# Altium PCB PCB.PcbDoc
Units mm, origin at the board's own origin, x right, y up, seen from the top; angles counter-clockwise.
Board outline 80 x 50 mm, 2 copper layers (Top Layer, Bottom Layer); 107 components, 80 nets, 393 pads, 363 vias.
Unrouted connection lines stored in the file: 2.
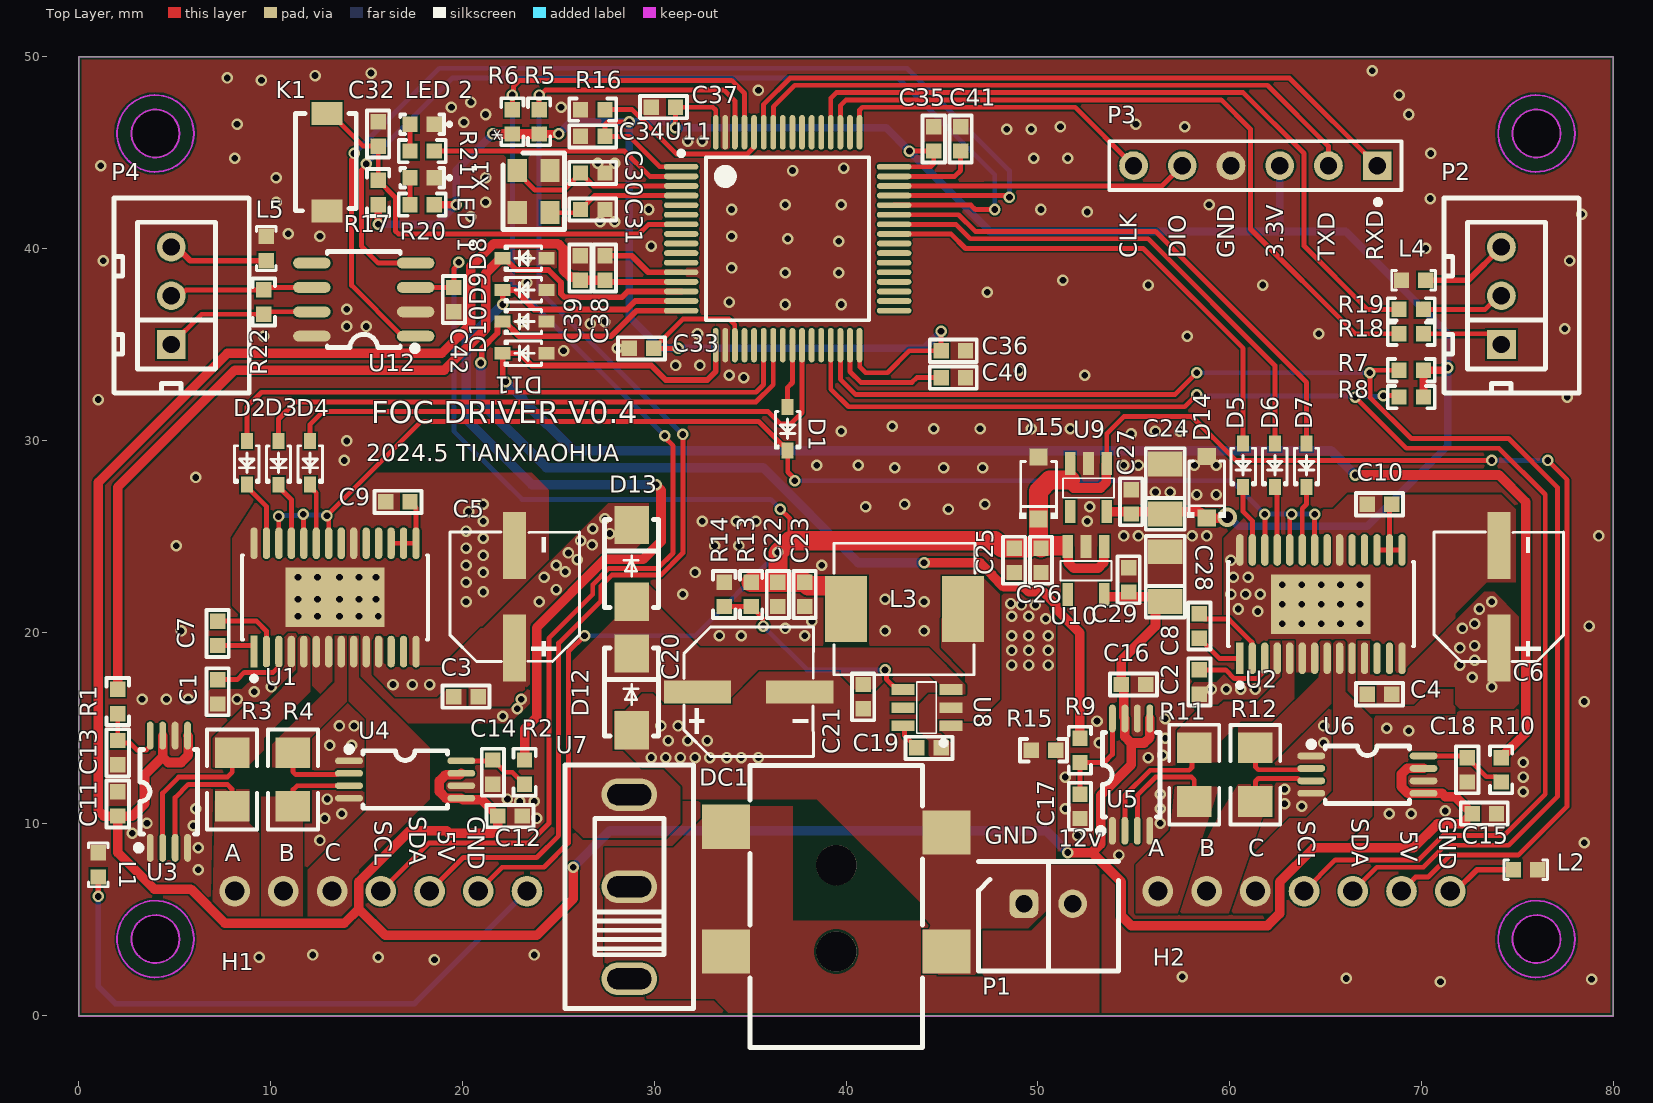
[diagram p0: Top Layer view]
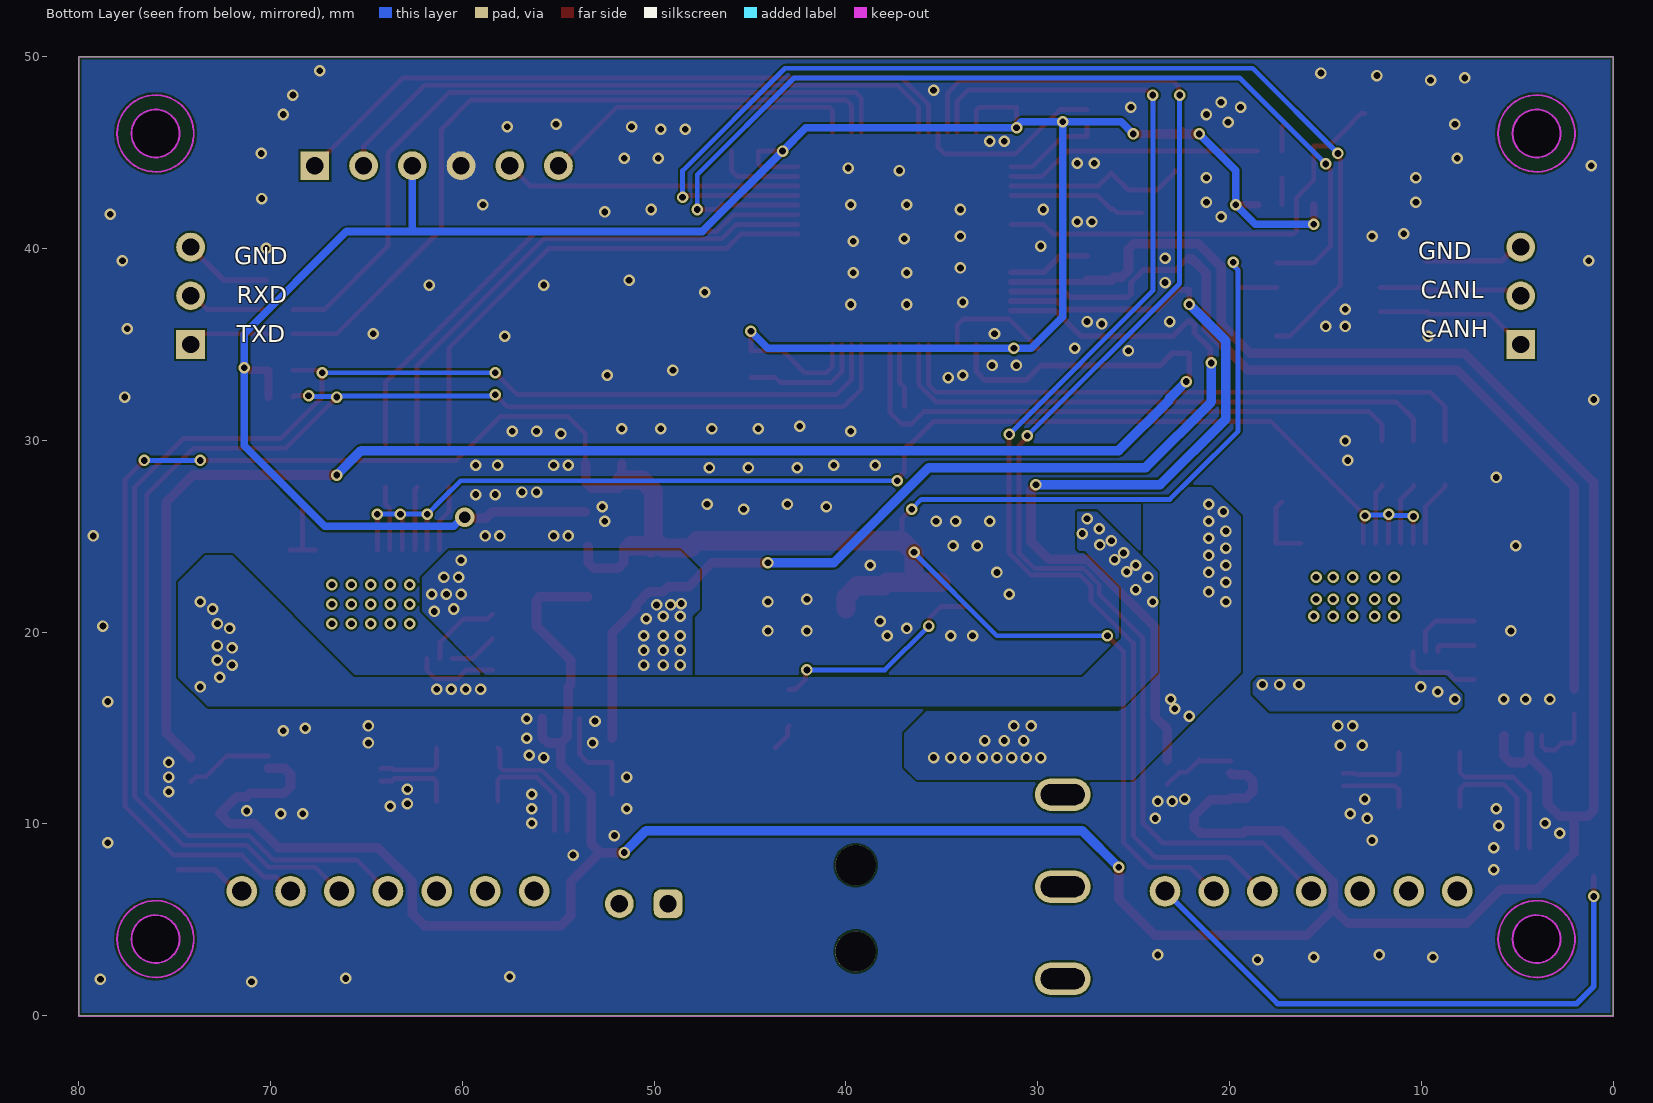
[diagram p1: Bottom Layer view, seen from below]

## Layer stack, top to bottom
Top Solder: solder mask 0.0102, Solder Resist, Dk 3.5
Top Layer: signal copper 0.0356
Dielectric 1: dielectric 0.32, FR-4, Dk 4.8
Bottom Layer: signal copper 0.0356
Bottom Solder: solder mask 0.0102, Solder Resist, Dk 3.5

## Board outline
0,0 0,50 80,50 80,0
cut-out: 74.75,46 ccw(c76,46) 76,44.75 ccw(c76,46) 77.25,46 ccw(c76,46) 76,47.25 ccw(c76,46)
cut-out: 74.75,4 ccw(c76,4) 76,2.75 ccw(c76,4) 77.25,4 ccw(c76,4) 76,5.25 ccw(c76,4)
cut-out: 2.75,4 ccw(c4,4) 4,2.75 ccw(c4,4) 5.25,4 ccw(c4,4) 4,5.25 ccw(c4,4)
cut-out: 4,44.75 cw(c4,46) 2.75,46 cw(c4,46) 4,47.25 cw(c4,46) 5.25,46 cw(c4,46)

## Design rules (kind name [scope] priority, off if disabled: settings)
Clearance [All] p1: gap=0.1 ignorepadtopadclearanceinfootprint=FALSE except(0: Arc-Hole Track-Hole SMDPad-Hole THPad-Hole Via-Hole Fill-Hole Poly-Hole Region-Hole Text-Hole; 0.102: Arc-Arc Arc-Track Arc-SMDPad Arc-THPad Track-Track Track-SMDPad Track-THPad SMDPad-SMDPad SMDPad-THPad THPad-THPad; 0.127: Arc-Via Track-Via SMDPad-Via SMDPad-Text THPad-Via Via-Via; 0.254: Arc-Text Track-Text THPad-Text Via-Text Fill-Text Poly-Text Region-Text Text-Text)
HoleSize [All] p1: absolutevalues=TRUE maxlimit=30 minlimit=0.025 maxpercent=80.000 minpercent=20.000
HoleToHoleClearance [All] p1: gap=0.152 allowstackedmicrovias=TRUE
MinimumSolderMaskSliver [All] p1: minsoldermaskwidth=0
PlaneClearance [All] p1: clearance=0.254
PlaneConnect [All] p1: planeconnectstyle=Direct reliefexpansion=0.508 reliefentries=4 reliefconductorwidth=0.254 reliefairgap=0.254
PolygonConnect [All] p1: connectstyle=Direct reliefconductorwidth=0.254 reliefentries=4 polygonreliefangle="90 Angle" airgapwidth=0.254
RoutingVias [All] p1: holewidth=0.711 width=1.27 viastyle="Through Hole" minholewidth=0.3 minwidth=0.5 maxholewidth=30 maxwidth=30
SilkToSilkClearance [All] p1: silktosilkclearance=0
SilkToSolderMaskClearance [IsPad] p1: minsilkscreentomaskgap=0 clearancetoexposedcopper=TRUE
SolderMaskExpansion [All] p1: expansion=0.102 istentingtop=FALSE
Width [All] p1: maxlimit=3 minlimit=0.1 preferedwidth=0.254
23 further rules are at their usual default settings.

## Classes and differential pairs
component class Sheet3-can: C42 L5 P4 R21 U12
component class Sheet0-MCU: C30 C31 C32 C33 C34 C35 C36 C37 C38 C39 C40 C41 K1 L4 "LED 1" "LED 2" P2 P3 R16 R17 R18 R19 R21 U11 X1
component class Sheet2-power: C19 C20 C21 C22 C23 C24 C25 C26 C27 C28 C29 D12 D13 D14 D15 DC1 L3 P1 R13 R14 R15 U7 U8 U9 U10
component class Sheet1-driver: C1 C2 C3 C4 C5 C6 C7 C8 C9 C10 C11 C12 C13 C14 C15 C16 C17 C18 D1 D2 D3 D4 D5 D6 D7 D8 D9 D10 D11 H1 H2 L2 L3 R1 R2 R3 R4 R5 R6 R7 R8 R9 R10 R11 R12 U1 U2 U3 U4 U5 U6

## Components (designator, comment, footprint, x,y, rotation, side; value= is the part's Value field where it differs from the comment)
C1 "100nF" CC1608-0603 7.239,16.891 r270 top
C2 "100nF" CC1608-0603 58.42,17.399 r270 top
C3 "100NF 50V" CC1608-0603 20.193,16.637 r180 top
C4 "100NF 50V" CC1608-0603 67.818,16.764 r180 top
C5 "35V 100uF" CAP-SMD_D6.3 22.723,21.847 r90 top
C6 "35V 100uF" CAP-SMD_D6.3 74.041,21.844 r90 top
C7 "0.01uF" CC1608-0603 7.239,19.939 r270 top
C8 "0.01uF" CC1608-0603 58.42,20.32 r270 top
C9 "0.47UF" CC1608-0603 16.637,26.797 r180 top
C10 "0.47UF" CC1608-0603 67.818,26.67 r180 top
C11 "100nF" CC1608-0603 2.032,11.049 r90 top
C12 "100nF" CC1608-0603 22.479,10.414 r0 top
C13 "2.2nF" CC1608-0603 2.032,13.716 r90 top
C14 "2.2nF" CC1608-0603 21.59,12.7 r90 top
C15 "100nF" CC1608-0603 73.279,10.541 r0 top
C16 "100nF" CC1608-0603 54.991,17.272 r0 top
C17 "2.2nF" CC1608-0603 52.197,10.922 r90 top
C18 "2.2nF" CC1608-0603 72.39,12.827 r90 top
C19 "100nF" CC1608-0603 44.323,13.97 r0 top
C20 "35V 100uF" CAP-SMD_D6.3 34.922,16.891 r0 top
C21 "100NF 50V" CC1608-0603 40.894,16.637 r90 top
C22 "22uf" CC1608-0603 36.449,21.971 r90 top
C23 "22uf" CC1608-0603 37.846,21.971 r90 top
C24 "22uF" TAN-A-1206 56.642,27.432 r90 top
C25 "2.2uf" CC1608-0603 48.768,23.749 r90 top
C26 "100nF" CC1608-0603 50.165,23.749 r90 top
C27 "100NF" CC1608-0603 54.864,26.797 r90 top
C28 "22uF" TAN-A-1206 56.642,22.86 r90 top
C29 "100NF" CC1608-0603 54.737,22.733 r90 top
C30 "22pF" CC1608-0603 26.797,43.942 r180 top
C31 "22pF" CC1608-0603 26.797,42.037 r180 top
C32 "1UF" CC1608-0603 15.611,45.974 r270 top
C33 "100NF" CC1608-0603 29.337,34.798 r0 top
C34 "100NF" CC1608-0603 26.797,45.847 r0 top
C35 "100NF" CC1608-0603 44.577,45.72 r270 top
C36 "100NF" CC1608-0603 45.593,34.671 r180 top
C37 "100NF" CC1608-0603 30.48,47.371 r0 top
C38 "100NF" CC1608-0603 27.432,38.989 r270 top
C39 "1uF" CC1608-0603 26.152,38.989 r270 top
C40 "2.2UF" CC1608-0603 45.593,33.274 r0 top
C41 "2.2UF" CC1608-0603 45.974,45.72 r270 top
C42 "100nF" CC1608-0603 19.558,37.338 r270 top
D1 "1N4148" SOD-323 36.957,30.61 r90 top
D2 "1N4148" SOD-323 8.763,28.829 r90 top
D3 "1N4148" SOD-323 10.414,28.826 r90 top
D4 "1N4148" SOD-323 12.065,28.829 r90 top
D5 "1N4148" SOD-323 60.706,28.702 r90 top
D6 "1N4148" SOD-323 62.357,28.702 r90 top
D7 "1N4148" SOD-323 64.008,28.702 r90 top
D8 "PESD3V3L1BA" SOD-323 23.241,39.497 r0 top
D9 "PESD3V3L1BA" SOD-323 23.241,37.846 r0 top
D10 "PESD3V3L1BA" SOD-323 23.241,36.195 r0 top
D11 "PESD3V3L1BA" SOD-323 23.241,34.544 r0 top
D12 "SMBJ24A" "DO-214 AA" 28.819,16.891 r270 top
D13 "SS34" "DO-214 AA" 28.819,23.59 r270 top
D14 "SMFJ5.0A" SOD-123 58.801,27.559 r90 top
D15 "SMFJ5.0A" SOD-123 50.038,27.518 r90 top
DC1 "DC-2.1" DC-IN-SMD_DC-050-25A 39.497,6.604 r180 top
H1 "Header_7P_Curved" Header_2_54_7PW 8.128,6.5 r0 top locked
H2 "Header_7P_Curved" Header_2_54_7PW 56.261,6.5 r0 top locked
K1 "KEY 3*4" "KEY 3*4" 12.944,47.05 r270 top
L1 "68nH 200mA" Inductor-0603 1.016,7.874 r90 top
L2 "68nH 200mA" Inductor-0603 75.438,7.62 r0 top
L3 "15uH" Inductor-0630 43.053,21.209 r0 top
L4 "68nH 200mA" Inductor-0603 69.596,38.354 r180 top
L5 "68nH 200mA" Inductor-0603 9.779,40.005 r90 top
"LED 1" "LED 0603" "LED 0603" 17.907,43.688 r0 top
"LED 2" "LED 0603" "LED 0603" 17.907,46.482 r0 top
P1 "Header 2" HX2.54-2 49.276,5.842 r0 top
P2 "Header 3" HX2.54-3 74.168,35 r90 top locked
P3 "Header 6" HDR1X6 67.691,44.323 r180 top
P4 "Header 3" HX2.54-3 4.826,35 r90 top locked
R1 "22R" CR1608-0603 2.032,16.383 r270 top
R2 "22R" CR1608-0603 23.241,12.7 r270 top
R3 "0.01R" CR3216-1206 7.991,12.319 r90 top
R4 "0.01R" CR3216-1206 11.166,12.322 r90 top
R5 "4.7k/NC" CR1608-0603 24.003,46.609 r270 top
R6 "4.7k/NC" CR1608-0603 22.606,46.609 r270 top
R7 "4.7k/NC" CR1608-0603 69.469,33.655 r0 top
R8 "4.7k/NC" CR1608-0603 69.469,32.258 r0 top
R9 "22R" CR1608-0603 52.197,13.843 r270 top
R10 "22R" CR1608-0603 74.158,12.827 r270 top
R11 "0.01R" CR3216-1206 58.156,12.573 r90 top
R12 "0.01R" CR3216-1206 61.341,12.57 r90 top
R13 "100K 1%" CR1608-0603 35.052,21.971 r90 top
R14 "13.3K 1%" CR1608-0603 33.655,21.971 r270 top
R15 "0R" CR1608-0603 50.292,13.843 r180 top
R16 "10KR" CR1608-0603 26.797,47.244 r0 top
R17 "10K" CR1608-0603 15.611,42.926 r270 top
R18 "22R" CR1608-0603 69.469,35.56 r0 top
R19 "22R" CR1608-0603 69.469,36.83 r0 top
R20 "2K" CR1608-0603 17.907,42.291 r0 top
R21 "2K" CR1608-0603 17.907,45.085 r0 top
R22 "120R" CR1608-0603 9.652,37.211 r270 top
U1 "DRV8313PWPR" HTSSOP-28 13.359,21.813 r90 top
U2 "DRV8313PWPR" HTSSOP-28 64.76,21.463 r90 top
U3 "INA240A1PWR" TSSOP-8 4.699,11.684 r0 top
U4 "INA240A1PWR" TSSOP-8 17.018,12.319 r270 top
U5 "INA240A1PWR" TSSOP-8 54.864,12.573 r0 top
U6 "INA240A1PWR" TSSOP-8 67.183,12.573 r270 top
U7 "HX SS12D10G4" SS12D10-G4 28.702,6.731 r90 top
U8 "TPS54202DDCR" SOT23-6 44.196,16.002 r90 top
U9 "SPX3819M5-L-3.3/TR" SOT23-5 51.689,28.789 r0 top
U10 "SPX3819M5-L-3.3/TR" SOT23-5 51.557,24.471 r0 top
U11 "STM32F405RCT6" LQFNP64 36.957,40.513 r0 top locked
U12 "TJA1050T" SOIC-8 14.859,37.338 r90 top locked
X1 "3225_12M" XTAL-3225 24.56,44.069 r270 top

## Footprints (in the part's own frame and the unit in brackets; to place one, negate y for a bottom-side part, rotate by r counter-clockwise, add the part's x,y. Pads: shape width x height; smd on the part's side, far side on the other; paste and mask are expansions set on the pad)
CAP-SMD_D6.3 [mm] "直径6.3mm固态电容"
  rect 3.5x1.2 smd paste+0 mask+0.051: 1(-2.67,0) 2(2.67,0)
  silkscreen extent -3.38,-3.38 3.38,3.38, body extent -3.65,-3.3 3.65,3.3, height 5.9
CC1608-0603 [mm]
  rect 0.8x0.8 smd: 1(-0.635,0) 2(0.635,0)
  silkscreen extent -1.23,-0.58 1.23,0.58, body extent -0.8,-0.4 0.8,0.4, height 0.3
CR1608-0603 [mm]
  rect 0.8x0.8 smd: 1(-0.635,0) 2(0.635,0)
  silkscreen extent -1.23,-0.58 1.23,0.58, body extent -0.8,-0.4 0.8,0.4, height 0.45
CR3216-1206 [mm]
  rect 1.6x1.8 smd: 1(-1.4,0) 2(1.4,0)
  silkscreen extent -2.6,-1.3 2.6,1.3, body extent -1.6,-0.8 1.6,0.8, height 0.6
DC-IN-SMD_DC-050-25A [mm]
  rect 2.5x2.3 smd: 1(5.75,3.25) 1(5.75,-3.25) 2(-5.75,3.25) 3(-5.75,-2.95)
  round 2.1 hole 2.1 unplated: ""(0,3.25) ""(0,-1.25)
  silkscreen extent -4.5,-6.45 4.5,8.25, body extent -6.28,-6.57 6.28,8.13, height 10.94
"DO-214 AA" [mm] "SMB"
  rect 2x1.8 smd: 1(-2,0) 2(2,0)
  silkscreen extent -2.3,-1.4 2.3,1.4, body extent -2.83,-1.8 2.57,1.8, height 2.4
HDR1X6 [mm] "Connector; Header; 6 Position"
  rect 1.5x1.5 hole 0.9: 1(0,0)
  round 1.5 hole 0.9: 2(2.54,0) 3(5.08,0) 4(7.62,0) 5(10.16,0) 6(12.7,0)
  silkscreen extent -1.27,-1.27 13.97,2.04, body extent -1.27,-1.27 13.97,1.27, height 8.54
Header_2_54_7PW [mm] "6P弯针"
  round 1.6 hole 1: 1(0,0) 2(2.54,0) 3(5.08,0) 4(7.62,0) 5(10.16,0) 6(12.7,0) 7(15.24,0)
  body extent -1.27,-10.07 16.51,0.25, height 2.75
HTSSOP-28 [mm]
  rect 1.655x0.381 smd paste+0 mask+0: 1(-2.825,4.225)
  rrect100% 1.655x0.381 smd paste+0 mask+0: 2(-2.825,3.575) 3(-2.825,2.925) 4(-2.825,2.275) 5(-2.825,1.625) 6(-2.825,0.975) 7(-2.825,0.325) 8(-2.825,-0.325) 9(-2.825,-0.975) 10(-2.825,-1.625) 11(-2.825,-2.275) 12(-2.825,-2.925) 13(-2.825,-3.575) 14(-2.825,-4.225) 15(2.825,-4.225) 16(2.825,-3.575) 17(2.825,-2.925) 18(2.825,-2.275) 19(2.825,-1.625) 20(2.825,-0.975) 21(2.825,-0.325) 22(2.825,0.325) 23(2.825,0.975) 24(2.825,1.625) 25(2.825,2.275) 26(2.825,2.925) 27(2.825,3.575) 28(2.825,4.225)
  rect 3.1x5.18 smd paste-1000 mask+0: 29(0,0)
  silkscreen extent -4.35,-4.85 2.2,4.85, body extent -3.9,-5.1 3.9,5.1, height 0.25
HX2.54-2 [mm] "两针白色插座（已加焊）"
  rrect50% 1.5x1.5 hole 0.9: 1(0,0)
  round 1.5 hole 0.9: 2(2.54,0)
  silkscreen extent -2.36,-3.5 4.94,2.2, body extent -2.48,-3.55 5.02,2.45, height 7
HX2.54-3 [mm]
  rect 1.5x1.5 hole 0.9: 1(0,0)
  round 1.5 hole 0.9: 2(2.54,0) 3(5.08,0)
  silkscreen extent -2.54,-4.06 7.63,3, body extent -2.41,-3.58 7.59,2.42, height 7
Inductor-0603 [mm]
  rect 0.8x0.8 smd: 1(-0.635,0) 2(0.635,0)
  silkscreen extent -1.14,-0.51 1.14,0.51, body extent -0.8,-0.43 0.8,0.43, height 0.48
Inductor-0630 [mm]
  rect 2.194x3.42 smd paste+0 mask+0.051: 1(3.048,0) 2(-3.048,0)
  silkscreen extent -3.68,-3.43 3.68,3.43, body extent -3.5,-3.3 3.5,3.3, height 2.8
"KEY 3*4" [mm]
  rect 1.2x1.6 smd: 1(0,0) 2(5.1,0)
  silkscreen extent 0,-1.65 5.08,1.52, body extent 0.25,-1.71 4.7,1.46, height 2.01
"LED 0603" [mm]
  rect 0.8x0.8 smd: 1(-0.635,0) 2(0.635,0)
  silkscreen extent -1.14,-0.51 1.48,0.51, body extent -0.8,-0.4 0.8,0.4, height 0.6
LQFNP64 [mm]
  oval 1.8x0.3 smd: 1(-5.55,3.75) 2(-5.55,3.25) 3(-5.55,2.75) 4(-5.55,2.25) 5(-5.55,1.75) 6(-5.55,1.25) 7(-5.55,0.75) 8(-5.55,0.25) 9(-5.55,-0.25) 10(-5.55,-0.75) 11(-5.55,-1.25) 12(-5.55,-1.75) 13(-5.55,-2.25) 14(-5.55,-2.75) 15(-5.55,-3.25) 16(-5.55,-3.75) 33(5.55,-3.75) 34(5.55,-3.25) 35(5.55,-2.75) 36(5.55,-2.25) 37(5.55,-1.75) 38(5.55,-1.25) 39(5.55,-0.75) 40(5.55,-0.25) 41(5.55,0.25) 42(5.55,0.75) 43(5.55,1.25) 44(5.55,1.75) 45(5.55,2.25) 46(5.55,2.75) 47(5.55,3.25) 48(5.55,3.75)
  oval 0.3x1.8 smd: 17(-3.75,-5.55) 18(-3.25,-5.55) 19(-2.75,-5.55) 20(-2.25,-5.55) 21(-1.75,-5.55) 22(-1.25,-5.55) 23(-0.75,-5.55) 24(-0.25,-5.55) 25(0.25,-5.55) 26(0.75,-5.55) 27(1.25,-5.55) 28(1.75,-5.55) 29(2.25,-5.55) 30(2.75,-5.55) 31(3.25,-5.55) 32(3.75,-5.55) 49(3.75,5.55) 50(3.25,5.55) 51(2.75,5.55) 52(2.25,5.55) 53(1.75,5.55) 54(1.25,5.55) 55(0.75,5.55) 56(0.25,5.55) 57(-0.25,5.55) 58(-0.75,5.55) 59(-1.25,5.55) 60(-1.75,5.55) 61(-2.25,5.55) 62(-2.75,5.55) 63(-3.25,5.55) 64(-3.75,5.55)
  silkscreen extent -5.67,-4.25 4.25,4.57, body extent -6.07,-6.07 6.07,6.07, height 1.62
SOD-123 [mm]
  rect 0.88x0.96 smd: 1(-1.61,0) 2(1.61,0)
  silkscreen extent -1.6,-1 1.38,1, body extent -1.9,-0.8 1.8,0.8, height 1.32
SOD-323 [mm]
  rect 0.83x0.63 smd paste+0 mask+0.05: 1(-1.14,0) 2(1.14,0)
  silkscreen extent -1.02,-0.64 0.89,0.64, body extent -1.27,-0.68 1.33,0.68, height 1.1
SOIC-8 [mil]
  oval 22.38x76.78 smd paste+0 mask+2: 1(-75,-106.5) 2(-25,-106.5) 3(25,-106.5) 4(75,-106.5) 5(75,106.5) 6(25,106.5) 7(-25,106.5) 8(-75,106.5)
  silkscreen extent -106,-111 98,75, body extent -98,-125 98,120, height 69
SOT23-5 [mm] "适用于MIC5205"
  rect 0.55x1.2 smd: 1(1.905,0) 2(0.955,0) 3(0.005,0) 4(0.005,-2.5) 5(1.905,-2.5)
  silkscreen extent -0.38,-1.78 2.29,-0.76, body extent -0.6,-2.82 2.5,0.38, height 1.45
SOT23-6 [mm]
  rect 0.55x1.2 smd: 1(-0.889,-1.27) 2(0.061,-1.27) 3(1.011,-1.27) 4(1.011,1.23) 5(0.061,1.23) 6(-0.889,1.23)
  silkscreen extent -1.9,-1.02 1.4,0.51, body extent -1.39,-1.4 1.51,1.4, height 1.45
SS12D10-G4 [mm]
  oval 1.7x2.9 hole 1.1 slot 2.3 at 90 deg: 1(-4.8,0) 2(0,0) 3(4.8,0)
  silkscreen extent -6.35,-3.35 6.35,3.35, body extent -6.32,-3.25 6.3,3.25, height 9.3
TAN-A-1206 [mm]
  rect 1.3x1.8 smd: 1(-1.27,0) 2(1.333,0)
  silkscreen extent -2.1,-1.02 2.16,1.02, body extent -1.66,-0.8 1.54,0.8, height 1.6
TSSOP-8 [mm]
  oval 0.353x1.454 smd: 1(-0.975,-2.927) 2(-0.325,-2.927) 3(0.325,-2.927) 4(0.975,-2.927) 5(0.975,2.927) 6(0.325,2.927) 7(-0.325,2.927) 8(-0.975,2.927)
  silkscreen extent -1.73,-3.08 1.5,2.2, body extent -1.43,-3.17 1.57,3.11, height 1.09
XTAL-3225 [mm]
  rect 1.2x1 smd: 1(0,-1.7) 2(2.2,-1.7) 3(2.2,0) 4(0,0)
  silkscreen extent -0.91,-2.44 3.07,0.76, body extent -0.43,-2.15 2.77,0.35, height 0.61

## Part data
C1 C2 C3 C4 C7 C8 C9 C10 C11 C12 C13 C14 C15 C16 C17 C18 C19 C21 C22 C23 C25 C26 C30 C31 C32 C33 C34 C35 C36 C37 C38 C39 C40 C41 C42: library part "Cap Chip 0603", "0603封装的电容", Published=8-Jun-2000, Publisher="Altium Limited", Revision="July-2002: Re-released for DXP Platform."
C5 C6 C20: library part "Cap ECAP SMD", "铝点解电容", BOM_Manufacturer=PANASONIC, BOM_Manufacturer Part=EEEFP1C681AP, BOM_Supplier=LCSC, BOM_Supplier Part=C413527, Contributor=LCSC, nameAlias=Capacitance, spicePre=C, spiceSymbolName=EEEFP1C681AP
C24 C28: library part "CAP TAN-A-1206", "钽电容"
C27 C29: library part "Chip capacitor", "贴片电容"
D1 D2 D3 D4 D5 D6 D7: "1N5819 SOD-323封装 小体积SS14 印S4 肖特基二极管"
D8 D9 D10 D11: "SOD-323 3.3V 双向ESD防静电二极管保护芯片", JLCPCB Part Class="Extended Part", Manufacturer=MDD, Manufacturer Part=SMAJ6.5CA, spicePre=D, spiceSymbolName=SMAJ6.5CA-C110041, Supplier=LCSC, Supplier Part=C110041
D12: library part SMBJ18A, "TVS稳压二极管"
D13: "肖特基二极管"
D14 D15: "5V单向贴片TVS瞬变抑制二极管"
DC1: library part DC-050, "DC贴片插座", BOM_JLCPCB Part Class="Extended Part", BOM_Manufacturer=韩国韩荣, BOM_Manufacturer Part=DC-050-25A, BOM_Supplier=LCSC, BOM_Supplier Part=C707275, Contributor=LCSC, spicePre=D, spiceSymbolName=DC-050-25A
H1 H2: "弯的6P排针"
K1: "轻触开关按键"
L1 L2 L4 L5: library part Inductor-0603, "贴片电感 0603封装"
L3: library part Inductor-0630, "贴片电感 0630封装"
P1: "Header, 2-Pin", LatestRevisionDate=17-Jul-2002, LatestRevisionNote="Re-released for DXP Platform.", Publisher="Altium Limited"
P2 P4: "Header, 3-Pin", LatestRevisionDate=17-Jul-2002, LatestRevisionNote="Re-released for DXP Platform.", Publisher="Altium Limited"
P3: "Header, 6-Pin", LatestRevisionDate=17-Jul-2002, LatestRevisionNote="Re-released for DXP Platform.", Publisher="Altium Limited"
R1 R2 R5 R6 R7 R8 R9 R10 R13 R14 R15 R16 R17 R18 R19 R20 R21 R22: library part "Resistor Chip 0603", "0603封装电阻", Published=8-Jun-2000, Publisher="Altium Limited", Revision="July-2002: Re-released for DXP Platform."
R3 R4 R11 R12: library part "Resistor Chip 1206", "1206封装电阻", Published=8-Jun-2000, Publisher="Altium Limited", Revision="July-2002: Re-released for DXP Platform."
U1 U2: library part DRV8313, "独立控制的半 H 桥驱动器,主要用于驱动一个三项无刷电机IC MOTOR DRIVER 8V-60V 28HTSSOP", Case/Package=HTSSOP, Max Operating Temperature=125°C, Max Supply Voltage=60V, Min Operating Temperature=-40°C, Min Supply Voltage=8V, Output Current=1.75A, Package Quantity=2000, Interface=Parallel, Lead Free="Lead Free", Logic Function="AND GATE", Mount="Surface Mount", Number of Outputs=1, Number of Pins=28, Packaging="Tape and Reel", Series=-
U3 U4 U5 U6: "超精密电流检测放大器"
U7: library part SS12D10G4, BOM_JLCPCB Part Class="Extended Part", BOM_Manufacturer=hanxia(韩下), BOM_Manufacturer Part="HX SS12D10G4", BOM_Supplier=LCSC, BOM_Supplier Part=C5149841, Contributor=lcsc, link=https://atta.szlcsc.com/upload/public/pdf/source/20220907/2020D7183ED16DD6E2B9F5A13FB144CF.pdf, spicePre=U, spiceSymbolName="HX SS12D10G4"
U8: "同步降压转换器芯片 500Khz 4.2~28V输入，2A输出"
U9 U10: "LDO 3.3V , SOT-23-5 500ma"
U12: "1Mhz Can芯片，兼容3.3~5V设备", BOM_JLCPCB Part Class="Basic Part", BOM_Manufacturer=NXP(恩智浦), BOM_Manufacturer Part=TJA1050T/CM,118, BOM_Supplier=LCSC, BOM_Supplier Part=C6952, spicePre=U, spiceSymbolName=TJA1050T/CM,118
X1: library part "XTAL 3225", "3225封装的晶振"
U11: Contributor=czycb, spicePre=U, spiceSymbolName=STM32F405RCT6

## Via types
v1: diameter 0.6, hole 0.35, Top Layer to Bottom Layer, tented both sides, 362 vias
v2: diameter 1, hole 0.6, Top Layer to Bottom Layer, 1 vias

## Nets (pads, with @x,y where several pads share a name; then routed paths per layer and width w, separated by ;. In a path a pad name is that pad's centre, name@x,y a point inside that pad or via, vN(x,y) a via of type N, cw(c..) or ccw(c..) an arc to the next point about the centre after c; other vN are vias at no path point)
3.3V: C24.1 C27.1 C33.2 C34.2 C35.2 C36.2 C37.2 D14.1 P3.3 R5.2 R6.2 R7.2 R8.2 R17.2 R20.2 U9.5 U11.1 U11.19 U11.32 U11.48 U11.64 | length 154.5
  Top Layer w0.254: v1(28.702,46.609) 27.581,46.609 27.432,46.46 C34.2 28.702,45.847 30.286,44.263 U11.1 ; v1(31.106,46.292) 31.106,47.362 C37.2 33.058,47.371 33.207,47.222 U11.64 ; v1(31.242,34.798) C33.2 31.496,36.322 33.909,36.322 34.198,36.033 34.198,34.972 U11.19 ; U11.32 40.716,34.954 40.716,33.833 41.021,33.528 42.164,33.528 43.307,34.671 C36.2 v1(44.958,35.687) ; U11.48 44.428,44.263 44.577,44.412 C35.2 v1(43.307,45.085)
  Top Layer w0.4: R17.2 15.611,41.412 v1@15.621,41.402 ; R20.2 v1(19.685,42.291) ; R5.2 v1(25.019,45.974) ; R8.2 R7.2 71.193,33.655 71.32,33.782 v1(71.374,33.782)
  Top Layer w0.5: v1(21.59,45.974) 22.456,45.974 22.479,45.997 22.479,46.101 R6.2 R5.2 ; U9.5 58.421,26.289 58.761,25.949 D14.1 59.831,25.949 59.917,26.035 v2@59.944,26.035
  Bottom Layer w0.4: v1(15.621,41.275) 18.669,41.275 v1(19.685,42.291) 19.685,44.069 v1(21.59,45.974) ; v1(25.019,45.974) 25.654,46.609 v1(28.702,46.609) ; v1(31.106,46.292) 42.1,46.292 v1(43.307,45.085) 47.498,40.894 62.611,40.894 ; v1@31.115,46.355 30.861,46.609 v1(28.702,46.609) ; v1(44.958,35.687) 44.069,34.798 v1(31.242,34.798) 31.231,34.809 30.342,34.809 28.702,36.449 v1(28.702,46.609) ; v2@59.944,26.035 60.452,25.527 67.183,25.527 71.374,29.718 v1(71.374,33.782) 71.374,35.56 66.04,40.894 62.611,40.894 ; P3.3 62.611,40.894
  other v2: 59.874,25.992
5V: C22.2 C23.2 C25.2 C26.2 C42.1 D15.1 H1.6 H2.6 L3.2 R13.2 U9.1 U9.3 U10.1 U10.3 U12.3 | length 151.6
  Top Layer w0.254: U12.3 C42.1 19.558,38.947 19.806,39.195 v1(19.806,39.288) ; H1.6 22.075,7.747 24.257,7.747 25.527,9.017 25.527,18.97 v1(26.369,19.812) ; v1(36.576,26.416) 37.084,25.908 37.084,24.765 ; U9.1 53.594,30.353 54.483,31.242 58.039,31.242 60.325,28.956 v1(73.66,28.956) ; H2.6 69.7,7.239 70.358,7.239 71.495,8.376 75.051,8.376 77.597,10.922 77.597,27.94 v1(76.581,28.956)
  Top Layer w0.5: U10.3 51.587,24.446 51.587,23.618 51.877,23.328 53.144,23.328 53.437,23.621 53.437,24.446 U10.1 ; U9.3 51.694,27.685 51.86,27.519 53.276,27.519 53.569,27.812 53.569,28.764 U9.1
  Top Layer w1: R13.2 C22.2 ; L3.2 40.005,21.822 39.408,22.419 38.033,22.419 C23.2 C22.2 ; 49.657,24.511 49.53,24.384 C25.2 48.133,24.384 47.752,24.765 37.084,24.765 36.449,24.13 C22.2 ; C26.2 C26.2@50.038,24.511 ; 51.193,24.511 C26.2@50.038,24.511 ; 51.694,27.94 50.624,27.94 50.038,27.354 D15.1 C26.2@50.038,24.511
  Bottom Layer w0.254: v1(19.806,39.288) 19.74,39.222 19.74,39.044 19.558,38.862 19.558,30.48 21.971,28.067 23.114,26.924 36.068,26.924 v1(36.576,26.416) ; v1(26.369,19.812) 32.131,19.812 v1@36.449,24.13 ; v1(73.66,28.956) v1(76.581,28.956)
  other v1: 36.453,24.173
ADC1_IN0: D8.1 R1.1 U11.14 | length 47.9
  Top Layer w0.3: D8.1 22.201,39.497 22.816,38.882 24.491,38.882 25.146,38.227 25.146,37.641 25.322,37.465 28.324,37.465 28.622,37.763 U11.14
  Top Layer w0.5: R1.1 2.032,27.559 8.128,33.655 19.05,33.655 21.209,35.814 21.209,38.705 21.936,39.432 22.036,39.432 D8.1
ADC1_IN1: D9.1 R2.1 U11.15 | length 47.3
  Top Layer w0.3: v1(22.101,37.087) D9.1 22.733,37.846 23.749,36.83 28.575,36.83 29.008,37.263 U11.15
  Top Layer w0.5: R2.1 23.241,14.953 23.876,15.588 23.876,20.24 27.442,23.806 29.432,23.806 30.353,24.727 30.353,27.405 30.099,27.659 v1(30.099,27.686)
  Bottom Layer w0.5: v1(22.101,37.087) 20.193,35.179 20.193,31.115 23.622,27.686 v1(30.099,27.686)
ADC2_IN2: D10.1 R9.1 U11.16 | length 56.8
  Top Layer w0.3: v1(20.955,34.036) 21.012,34.093 21.012,34.775 21.836,35.598 21.836,36.03 22.001,36.195 22.201,36.195 22.963,35.433 27.746,35.433 29.076,36.763 U11.16
  Top Layer w0.5: v1@44.042,23.622 46.992,23.622 47.625,22.989 47.625,22.96 48.222,22.362 49.271,22.362 49.535,22.098 50.292,22.098 50.935,21.455 50.935,21.225 52.197,19.964 R9.1
  Bottom Layer w0.5: v1(20.955,34.036) 20.955,32.004 24.384,28.575 35.687,28.575 40.64,23.622 v1(44.069,23.622)
ADC2_IN3: D11.1 R10.1 U11.17 | length 84.5
  Top Layer w0.3: v1(22.262,33.066) 22.262,33.069 22.101,33.23 D11.1 22.987,34.544 23.622,33.909 29.845,33.909 30.607,33.147 32.766,33.147 33.207,33.588 U11.17
  Top Layer w0.5: v1(66.548,28.194) 74.041,28.194 75.438,26.797 75.438,14.742 R10.1
  Bottom Layer w0.5: v1(22.262,33.066) 23.142,32.186 23.142,32.108 25.786,29.464 65.278,29.464 v1(66.548,28.194)
AGND: "LED 1.2" "LED 2.2" C11.2 C12.2 C13.1 C14.1 C15.2 C16.2 C17.1 C18.1 C22.1 C23.1 C24.2 C25.1 C26.1 C27.2 C28.2 C29.2 C30.1 C31.1 C32.1 C33.1 C34.1 C35.1 C36.1 C37.1 C38.1 C39.1 C40.2 C41.1 C42.2 D8.2 D9.2 D10.2 D11.2 D14.2 D15.2 K1.2 L1.2 L2.2 L4.2 L5.2 P3.4 R14.1 R15.1 R16.1 U3.1 U3.4 U3.6 U4.1 U4.4 U4.6 U5.1 U5.4 U5.6 U6.1 U6.4 U6.6 U9.2 U10.2 U11.12 U11.18 U11.63 U12.2 U12.8 X1.2 X1.4 | length 4.3
  Top Layer w0.3: C38.1 28.829,39.624 29.69,38.763 U11.12
  other v1: 70.993,1.778 78.867,1.905 66.083,1.948 57.531,2.032 18.542,2.921 9.398,3.048 15.621,3.048 12.192,3.175 23.749,3.175 6.223,7.62 54.229,8.382 6.223,8.763 78.486,9.017 12.573,9.144 52.07,9.398 2.794,9.525 5.969,9.906 3.556,10.033 56.388,10.033 12.827,10.287 23.876,10.287 13.716,10.541 68.326,10.541 69.469,10.541 71.247,10.681 6.096,10.795 51.435,10.795 56.388,10.795 63.754,10.922 62.865,11.049 22.987,11.176 23.749,11.176 12.954,11.303 22.352,11.303 56.388,11.557 75.311,11.684 62.865,11.811 51.435,12.446 75.311,12.446 75.311,13.208 55.753,13.462 56.515,13.589 13.081,14.097 14.224,14.097 53.213,14.224 64.897,14.224 56.642,14.478 69.342,14.859 68.199,14.986 13.589,15.113 14.351,15.113 64.897,15.113 53.086,15.367 56.642,15.494 78.486,16.383 3.302,16.51 4.572,16.51 5.715,16.51 33.401,19.812 34.544,19.812 37.846,19.812 5.334,20.066 42.037,20.066 44.069,20.066 36.83,20.193 78.74,20.32 38.227,20.574 44.069,21.59 42.037,21.717 31.496,21.971 32.131,23.114 38.735,23.495 5.08,24.511 33.147,24.511 34.417,24.511 54.483,25.019 55.245,25.019 58.039,25.019 58.801,25.019 79.248,25.019 32.512,25.781 34.29,25.781 35.306,25.781 52.578,25.781 45.339,26.416 41.021,26.543 52.705,26.543 43.053,26.67 47.244,26.67 58.293,27.178 59.309,27.178 56.134,27.305 56.896,27.305 6.096,28.067 42.545,28.575 45.085,28.575 47.117,28.575 38.481,28.702 40.64,28.702 54.483,28.702 55.245,28.702 58.166,28.702 59.309,28.702 13.843,28.956 13.97,29.972 54.864,30.353 39.751,30.48 56.134,30.48 57.404,30.48 44.577,30.607 46.99,30.607 49.657,30.607 51.689,30.607 42.418,30.734 1.016,32.131 77.597,32.258 34.671,33.274 33.909,33.401 52.451,33.401 49.022,33.655 31.115,33.909 32.385,33.909 25.273,34.671 28.067,34.798 9.652,35.433 57.785,35.433 32.258,35.56 64.643,35.56 77.47,35.814 13.97,35.941 14.986,35.941 26.67,36.068 23.114,36.195 27.432,36.195 13.97,36.83 36.83,37.084 39.751,37.084 33.909,37.211 47.371,37.719 55.753,38.1 61.722,38.1 23.368,38.227 51.308,38.354 36.83,38.735 39.624,38.735 34.036,38.989 1.27,39.37 77.724,39.37 23.368,39.497 70.231,40.005 29.845,40.132 39.624,40.386 36.957,40.513 12.573,40.64 34.036,40.64 10.922,40.767 27.178,41.402 27.94,41.402 20.447,41.656 78.359,41.783 52.578,41.91 29.718,42.037 34.036,42.037 50.165,42.037 36.83,42.291 39.751,42.291 58.928,42.291 10.287,42.418 21.209,42.418 70.462,42.609 10.287,43.688 21.209,43.688 37.211,44.069 39.878,44.196 1.143,44.323 27.051,44.45 27.94,44.45 8.128,44.704 49.784,44.704 51.562,44.704 70.485,44.958 31.75,45.593 32.512,45.593 48.387,46.228 49.657,46.228 51.181,46.355 57.658,46.355 8.255,46.482 55.118,46.482 20.081,46.579 21.209,46.99 69.342,46.99 19.431,47.371 25.146,47.371 20.447,47.625 68.834,48.006 35.433,48.26 9.525,48.768 7.747,48.895 12.319,49.022 15.24,49.149 67.437,49.276
BOOT0: R16.2 U11.60 | length 9.7
  Top Layer w0.254: R16.2 28.85,47.244 29.216,46.878 29.216,46.876 31.158,44.934 34.864,44.934 35.198,45.269 35.198,46.054 U11.60
CAN1_RX: U11.44 U12.4 | length 51.5
  Top Layer w0.254: v1(14.986,44.411) 14.986,44.343 14.732,44.089 14.732,40.132 15.621,39.243 U12.4 ; U11.44 46.51,42.263 46.736,42.037 v1(47.752,42.037)
  Bottom Layer w0.254: v1(14.986,44.411) 19.47,48.895 42.709,48.895 47.752,43.852 v1(47.752,42.037)
CAN1_TX: U11.45 U12.1 | length 57
  Top Layer w0.254: v1(14.351,44.958) 14.285,44.892 14.285,44.697 14.224,44.636 14.224,38.082 16.873,35.433 U12.1 ; U11.45 48.336,42.763 48.427,42.672 v1(48.52,42.672)
  Bottom Layer w0.254: v1(14.351,44.958) 18.796,49.403 43.18,49.403 48.52,44.063 v1(48.52,42.672)
CANH: P4.1 R22.2 U12.7 | length 8
  Top Layer w0.254: P4.1 6.402,36.576 R22.2 ; R22.2@9.652,36.703 U12.7
CANL: P4.2 R22.1 U12.6 | length 7.5
  Top Layer w0.254: P4.2 5.064,37.778 5.53,37.778 5.598,37.846 R22.1 9.779,37.973 U12.6
DRV_EN: D1.2 U11.25 | length 3.3
  Top Layer w0.254: D1.2 36.957,32.766 37.209,33.018 37.209,34.961 U11.25
HSE_I: C30.2 U11.3 X1.1 | length 9.7
  Top Layer w0.254: X1.1 22.86,43.969 23.776,43.053 25.273,43.053 C30.2 26.841,43.263 U11.3
HSE_O: C31.2 U11.4 X1.3 | length 7.2
  Top Layer w0.254: X1.3 25.867,41.869 C31.2@26.098,42.1 ; C31.2 26.888,42.763 U11.4
I2C1_SCL: H1.4 R6.1 U11.61 | length 71.6
  Top Layer w0.254: H1.4 18.265,9.017 23.5,9.017 24.511,10.028 24.511,19.685 26.794,21.968 26.794,22.482 27.641,23.328 30.186,23.328 30.988,24.13 30.988,29.711 30.548,30.151 v1(30.548,30.235) ; R6.1 v1(22.606,48.006) 22.672,48.072 22.672,48.454 22.987,48.768 34.036,48.768 34.707,48.097 U11.61
  Bottom Layer w0.254: v1(22.606,48.006) 22.606,38.177 v1(30.548,30.235)
I2C1_SDA: H1.5 R5.1 U11.62 | length 66.8
  Top Layer w0.254: H1.5 20.043,8.255 23.876,8.255 25.019,9.398 25.019,19.431 27.236,21.648 27.236,22.421 27.788,22.972 30.338,22.972 31.496,24.13 v1(31.496,30.307) ; R5.1 v1(24.003,48.006) 24.071,48.006 24.325,48.26 33.655,48.26 34.207,47.708 U11.62
  Bottom Layer w0.254: v1(24.003,48.006) 24.003,37.8 v1(31.496,30.307)
I2C2_SCL: H2.4 R8.1 U11.29 | length 74.9
  Top Layer w0.254: U11.29 39.207,32.675 40.132,31.75 57.658,31.75 v1(58.293,32.385) ; H2.4 65.509,8.128 69.85,8.128 71.12,9.398 74.295,9.398 76.454,11.557 76.454,27.178 74.041,29.591 69.215,29.591 v1(66.548,32.258) ; v1(68.019,32.332) 68.76,32.332 R8.1
  Bottom Layer w0.254: v1(58.293,32.385) 58.356,32.322 66.484,32.322 v1(66.548,32.258) ; v1@66.651,32.298 66.654,32.295 67.982,32.295 v1(68.019,32.332)
I2C2_SDA: H2.5 R7.1 U11.30 | length 73.6
  Top Layer w0.254: U11.30 39.707,33.191 40.513,32.385 57.15,32.385 v1(58.293,33.528) ; H2.5 67.668,7.747 70.104,7.747 71.247,8.89 74.549,8.89 77.089,11.43 77.089,27.559 74.549,30.099 69.469,30.099 67.31,32.258 v1(67.31,33.528) 67.404,33.528 67.531,33.655 R7.1
  Bottom Layer w0.254: v1(58.293,33.528) v1(67.31,33.528)
LED0: R21.2 U11.2 | length 13.4
  Top Layer w0.254: R21.2 28.448,45.085 29.77,43.763 U11.2
M1_CS1: R3.2 U1.5 U3.2 | length 8
  Top Layer w0.254: U3.2 4.374,11.613 5.207,12.446 7.747,12.446 8.001,12.7 8.001,13.709 R3.2
M1_CS2: R4.2 U1.8 U4.2 | length 4
  Top Layer w0.254: R4.2 11.166,12.722 11.315,12.573 13.443,12.573 13.514,12.644 U4.2
M1_CS3: H1.3 U1.9
M1_IN1: D2.1 U1.27 | length 3.5
  Top Layer w0.254: D2.1 8.763,27.589 9.784,26.568 U1.27
M1_IN2: D3.1 U1.25 | length 3.3
  Top Layer w0.254: D3.1 10.414,27.586 11.084,26.916 U1.25
M1_IN3: D4.1 U1.23 | length 3.2
  Top Layer w0.254: D4.1 12.065,27.589 12.384,27.27 U1.23
M2_CS1: R11.2 U2.5 U5.2 | length 7
  Top Layer w0.254: U5.2 54.539,11.486 55.855,12.802 57.89,12.802 58.039,12.95 58.039,13.856 R11.2
M2_CS2: R12.2 U2.8 U6.2 | length 4
  Top Layer w0.254: R12.2 61.341,12.976 61.49,12.827 63.608,12.827 63.679,12.898 U6.2
M2_CS3: H2.3 U2.9
M2_IN1: D5.1 U2.27 | length 3.5
  Top Layer w0.254: D5.1 60.706,26.289 61.185,25.81 U2.27
M2_IN2: D6.1 U2.25 | length 3.3
  Top Layer w0.254: D6.1 62.461,27.458 62.461,24.313 U2.25
M2_IN3: D7.1 U2.23 | length 3.4
  Top Layer w0.254: U2.23 63.785,26.447 64.008,26.67 D7.1
M_EN: D1.1 U1.22 U1.24 U1.26 U2.22 U2.24 U2.26 | length 68.7
  Top Layer w0.254: v1(10.414,26.035) 10.424,26.025 10.424,24.648 U1.26 ; v1(11.697,26.149) 11.715,26.131 11.715,24.657 U1.24 ; v1(12.938,26.066) 17.86,30.988 35.439,30.988 36.669,29.758 36.769,29.758 36.957,29.57 D1.1 36.962,29.465 36.962,28.351 37.321,27.992 v1(37.321,27.898) ; v1@13.004,26.096 13.034,26.066 U1.22 ; U2.26 v1(61.835,26.154) ; U2.24 v1@63.135,25.964 ; U2.22 v1(64.434,26.154)
  Bottom Layer w0.254: v1(10.414,26.035) 10.471,26.092 11.64,26.092 v1(11.697,26.149) 11.738,26.108 12.897,26.108 v1(12.938,26.066) ; v1(37.321,27.898) 60.091,27.898 61.062,26.927 v1(61.835,26.154) v1(63.231,26.154) v1(64.434,26.154)
M_PWR: C1.2 C2.2 C3.1 C4.1 C5.1 C6.1 D13.1 U1.4 U1.11 U2.4 U2.11
  other v1: 8.255,16.51 9.144,16.891 59.055,17.018 59.817,17.018 60.579,17.018 61.341,17.018 10.033,17.145 73.66,17.145 16.383,17.272 17.399,17.272 18.288,17.272 72.644,17.653 72.009,18.288 72.771,18.542 72.009,19.177 72.771,19.304 72.136,20.193 72.771,20.447 73.025,21.209 24.003,21.59 73.66,21.59 24.892,22.225 24.257,22.86 25.362,23.152 24.892,23.495 25.997,23.787 25.527,24.13 26.759,24.549 26.162,24.765 27.686,25.141 26.797,25.4 27.432,25.908
NetC1_1: C1.1 U1.3 | length 4.3
  Top Layer w0.254: C1.1 8.255,17.526 8.636,17.907 10.138,17.907 10.434,18.203 U1.3
NetC2_1: C2.1 U2.3 | length 4.4
  Top Layer w0.254: C2.1 59.797,18.034 60.25,17.581 61.416,17.581 61.835,18 U2.3
NetC7_1: C7.1 U1.2 | length 3.8
  Top Layer w0.254: C7.1 9.271,20.574 9.784,20.061 U1.2
NetC7_2: C7.2 U1.1 | length 2.2
  Top Layer w0.254: C7.2 9.071,19.304 9.134,19.241 U1.1
NetC8_1: C8.1 U2.2 | length 4.2
  Top Layer w0.254: C8.1 58.693,20.682 59.963,20.682 61.161,19.484 61.161,18.662 U2.2
NetC8_2: C8.2 U2.1 | length 2.5
  Top Layer w0.254: C8.2 59.467,18.638 U2.1
NetC13_2: C13.2 R1.2 U3.8 | length 3.9
  Top Layer w0.254: R1.2 C13.2 2.156,14.227 2.664,14.227 3.03,13.861 3.525,13.861 3.724,14.061 U3.8
NetC14_2: C14.2 R2.2 U4.8 | length 3.8
  Top Layer w0.254: U4.8 21.549,13.294 C14.2 22.225,12.7 22.606,12.7 R2.2
NetC17_2: C17.2 R9.2 U5.8 | length 5.4
  Top Layer w0.254: C17.2 R9.2 53.467,13.208 53.889,13.63 U5.8
NetC18_2: C18.2 R10.2 U6.8 | length 4.6
  Top Layer w0.254: U6.8 72.304,13.548 C18.2 73.387,12.465 73.885,12.465 R10.2
NetC19_1: C19.1 U8.6 | length 1.4
  Top Layer w0.254: U8.6 43.056,15.023 43.056,14.602 C19.1
NetC19_2: C19.2 L3.1 U8.2
NetDC1_1: DC1.1 P1.2 U7.2
NetH1_7: H1.7 L1.1 | length 30.9
  Top Layer w0.3: v1(1.016,6.223) L1.1
  Bottom Layer w0.3: v1(1.016,6.223) 1.016,1.778 1.013,1.775 1.013,1.527 1.905,0.635 17.503,0.635 H1.7
NetH2_7: H2.7 L2.1 | length 3.8
  Top Layer w0.3: H2.7 71.778,6.5 72.898,7.62 L2.1
NetL4_1: L4.1 P2.3 | length 4.7
  Top Layer w0.3: L4.1 72.442,38.354 P2.3
NetL5_1: L5.1 P4.3 | length 5.2
  Top Layer w0.3: P4.3 5.103,40.08 5.813,39.37 L5.1
"NetLED 1_1": "LED 1.1" R20.1 | length 1.4
  Top Layer w0.254: R20.1 17.272,43.688
"NetLED 2_1": "LED 2.1" R21.1 | length 1.4
  Top Layer w0.254: 17.145,46.482 17.272,46.355 R21.1
NetP2_1: P2.1 R18.2 | length 4.3
  Top Layer w0.254: R18.2 73.66,35.56 P2.1@74.168,35.052
NetP2_2: P2.2 R19.2 | length 4.4
  Top Layer w0.254: R19.2 73.331,36.83 74.093,37.592 P2.2@74.168,37.592
NetR13_1: R13.1 R14.2 U8.4 | length 11.6
  Top Layer w0.254: R14.2 R13.1 35.659,20.729 35.659,20.348 v1(35.687,20.32) ; v1(42.037,18.034) 42.103,17.968 42.103,17.551 42.641,17.013 U8.4
  Bottom Layer w0.254: v1(35.687,20.32) 37.973,18.034 v1(42.037,18.034)
NRST: C32.2 K1.1 R17.1 U11.7 | length 23.4
  Top Layer w0.254: K1.1 13.144,47.05 13.617,46.577 13.617,46.552 14.83,45.339 C32.2 R17.1 16.51,42.662 16.51,40.916 16.659,40.767 29.21,40.767 29.706,41.263 U11.7
OUT1: H1.1 R3.1 U3.3 | length 6.9
  Top Layer w0.254: U3.3 5.024,11.374 5.715,12.065 7.747,12.065 7.991,11.821 R3.1
OUT2: H1.2 R4.1 U4.3 | length 3.9
  Top Layer w0.254: R4.1 11.176,10.932 11.176,11.789 11.381,11.994 U4.3
OUT3: H2.1 R11.1 U5.3 | length 6.4
  Top Layer w0.254: U5.3 55.189,11.501 56.134,12.446 58.019,12.446 58.156,12.309 R11.1
OUT4: H2.2 R12.1 U6.3 | length 4.1
  Top Layer w0.254: R12.1 61.341,12.223 61.49,12.372 63.555,12.372 63.679,12.248 U6.3
PGND: C3.2 C4.2 C5.2 C6.2 C9.2 C10.2 C20.2 C21.1 D12.2 DC1.2 DC1.3 P1.1 R15.2 U1.6 U1.7 U1.10 U1.14 U1.20 U1.28 U1.29 U2.6 U2.7 U2.10 U2.14 U2.20 U2.28 U2.29 U8.1
  other v1: 29.845,13.462 30.607,13.462 31.369,13.462 32.131,13.462 32.893,13.462 33.782,13.462 34.544,13.462 35.433,13.462 30.734,14.351 31.75,14.351 32.766,14.351 30.353,15.113 31.242,15.113 22.098,15.621 22.86,16.002 23.072,16.51 48.641,18.288 49.53,18.288 50.546,18.288 48.641,19.05 49.53,19.05 50.546,19.05 48.641,19.812 49.53,19.812 50.546,19.812 62.738,20.447 63.754,20.447 64.77,20.447 65.786,20.447 66.802,20.447 50.419,20.701 11.43,20.828 12.446,20.828 13.589,20.828 14.605,20.828 15.621,20.828 48.641,20.828 49.53,20.828 61.468,21.082 60.452,21.209 49.149,21.421 49.877,21.421 62.738,21.463 63.754,21.463 64.77,21.463 65.786,21.463 66.802,21.463 48.592,21.492 20.193,21.59 11.43,21.717 12.446,21.717 13.589,21.717 14.605,21.717 15.494,21.717 60.071,21.971 60.833,21.971 61.595,21.971 21.082,22.098 62.738,22.479 63.754,22.479 64.77,22.479 65.786,22.479 66.802,22.479 20.193,22.606 11.43,22.86 12.446,22.86 13.589,22.86 14.605,22.86 15.494,22.86 60.198,22.86 60.96,22.86 21.082,23.114 20.193,23.495 60.071,23.749 21.082,24.003 20.193,24.384 21.082,24.892 20.193,25.273 21.082,25.781 20.32,26.289 21.082,26.67
PWM1_CH1: D5.2 U11.41 | length 25.6
  Top Layer w0.254: U11.41 45.47,40.763 46.228,40.005 55.499,40.005 60.706,34.798 D5.2
PWM1_CH2: D6.2 U11.42 | length 27
  Top Layer w0.254: U11.42 45.727,41.263 46.477,40.513 55.748,40.513 62.357,33.904 D6.2
PWM1_CH3: D7.2 U11.43 | length 28.3
  Top Layer w0.254: U11.43 45.867,41.763 46.736,40.894 56.134,40.894 64.008,33.02 D7.2
PWM3_CH1: D2.2 U11.22 | length 31.3
  Top Layer w0.254: D2.2 8.763,31.75 9.525,32.512 35.306,32.512 35.707,32.913 U11.22
PWM3_CH2: D3.2 U11.23 | length 29.7
  Top Layer w0.254: D3.2 10.414,31.115 11.303,32.004 35.306,32.004 36.207,32.905 U11.23
PWM3_CH3: D4.2 U11.26 | length 30.8
  Top Layer w0.254: D4.2 12.065,30.839 12.722,31.496 35.941,31.496 36.576,30.861 37.121,30.861 37.707,31.447 U11.26
RXD1: P3.1 U11.59 | length 35.9
  Top Layer w0.254: U11.59 35.707,47.518 37.084,48.895 63.119,48.895 P3.1
SWCLK: P3.6 U11.49 | length 16.8
  Top Layer w0.254: U11.49 40.707,47.222 40.856,47.371 51.943,47.371 P3.6
SWDIO: P3.5 U11.46 | length 15.5
  Top Layer w0.254: U11.46 47.177,43.263 56.471,43.263 P3.5
TXD1: P3.2 U11.58 | length 33.1
  Top Layer w0.254: U11.58 36.216,46.072 36.216,47.392 37.338,48.514 61.976,48.514 65.151,45.339 P3.2
USART3_RX: R19.1 U11.52 | length 39
  Top Layer w0.254: U11.52 39.207,47.843 39.497,48.133 60.706,48.133 63.881,44.958 63.881,40.132 67.183,36.83 R19.1
USART3_TX: R18.1 U11.51 | length 38.7
  Top Layer w0.254: U11.51 39.707,47.454 40.005,47.752 59.563,47.752 61.087,46.228 61.087,41.021 66.548,35.56 R18.1
V3P3: C9.1 U1.15 U1.16 U1.17 | length 3.6
  Top Layer w0.254: U1.17 U1.16 U1.15 17.584,26.485 C9.1
V3P32: C10.1 U2.15 U2.16 U2.17 | length 3.7
  Top Layer w0.254: U2.17 U2.16 ; C10.1 68.335,26.552 U2.16 ; U2.15 U2.16
VCAP1: C40.1 U11.31 | length 6.5
  Top Layer w0.254: U11.31 40.207,33.58 40.767,33.02 43.434,33.02 43.688,33.274 C40.1
VCAP2: C41.2 U11.47 | length 4.6
  Top Layer w0.254: U11.47 45.668,43.763 45.974,44.069 C41.2
VDDA: C11.1 C12.1 C15.1 C16.1 C28.1 C29.1 C38.2 C39.2 U3.5 U3.7 U4.5 U4.7 U5.5 U5.7 U6.5 U6.7 U10.5 U11.13 | length 191.8
  Top Layer w0.3: C38.2 27.523,38.263 U11.13
  Top Layer w0.5: U3.7 4.374,13.501 ; U3.5 5.715,14.57 5.715,13.589 5.334,13.208 4.667,13.208 4.374,13.501 ; U4.7 19.871,12.57 19.168,12.57 19.134,12.536 19.089,12.536 18.796,12.243 18.796,11.684 19.136,11.344 U4.5 20.018,11.271 20.987,11.271 C12.1 21.844,9.818 21.551,9.525 19.304,9.525 19.177,9.652 17.271,9.652 14.596,6.977 14.596,5.579 ; v1(25.781,7.747) 25.781,6.096 23.876,4.191 15.985,4.191 14.596,5.579 ; C38.2 C39.2 26.002,38.504 25.631,38.504 25.273,38.862 25.273,39.966 24.98,40.259 21.636,40.259 20.447,39.07 20.447,36.068 18.923,34.544 7.747,34.544 1.016,27.813 1.016,10.707 1.309,10.414 C11.1 ; v1(51.562,8.509) 52.832,8.509 ; U10.5@53.462,21.856 C28.1@56.019,21.856 ; U5.5 55.839,14.517 55.546,14.224 54.864,14.224 ; C28.1@56.019,21.769 56.134,21.653 56.134,20.32 54.356,18.542 C16.1 54.483,17.145 54.483,15.556 U5.7 54.539,14.549 54.864,14.224 ; U6.7 69.254,12.898 68.961,12.605 68.961,11.938 69.301,11.598 U6.5 71.079,11.598 71.247,11.43 71.755,11.43 C15.1 72.107,10.004 70.837,10.004 69.596,8.763 64.389,8.763 62.611,6.985 62.611,5.334 61.976,4.699 54.864,4.699 54.356,5.207 54.356,6.985 52.832,8.509 ; C11.1 2.032,8.509 3.937,6.604 5.842,6.604 7.62,4.826 13.843,4.826 14.596,5.579 ; C11.1 2.794,10.414 3.429,11.049 3.429,12.556 4.374,13.501 ; 52.832,8.509 53.276,8.953 53.276,11.493 54.864,13.081 54.864,14.224
  Bottom Layer w0.5: v1(25.781,7.747) 27.686,9.652 50.419,9.652 v1(51.562,8.509)
VDDP: C20.1 C21.2 D12.1 D13.2 U7.3 U8.3
pads on no net: DC1. U1.12 U1.13 U1.18 U1.19 U1.21 U2.12 U2.13 U2.18 U2.19 U2.21 U7.1 U8.5 U9.4 U10.4 U11.5 U11.6 U11.8 U11.9 U11.10 U11.11 U11.20 U11.21 U11.24 U11.27 U11.28 U11.33 U11.34 U11.35 U11.36 U11.37 U11.38 U11.39 U11.40 U11.50 U11.53 U11.54 U11.55 U11.56 U11.57 U12.5

## Polygon pours and split planes (outlines as drawn)
AGND on Top Layer "AGND_L01_P044" (solid, remove dead copper, pour order 44): 0,0 0,50 80,50 80,0
M2_CS3 on Top Layer "M2_CS3_L01_P016" (solid, pour order 16): 60.071,5.334 60.071,7.239 63.119,10.287 64.008,10.287 65.405,11.684 65.405,17.526 65.405,19.431 65.532,19.558 66.04,19.558 66.04,16.891 67.437,15.494 67.437,10.414 65.532,8.509 64.389,8.509 62.611,6.731 62.611,5.334
PGND on Top Layer "PGND_L01_P031" (solid, remove dead copper, pour order 31): 8.001,24.892 8.001,21.374 14.135,15.24 22.479,15.24 24.511,17.272 24.511,27.432 23.622,28.321 10.183,28.321
VDDP on Top Layer "VDDP_L01_P012" (solid, pour order 12): 30.226,18.542 30.226,17.78 28.448,16.002 27.94,16.002 27.94,14.224 29.337,12.827 30.48,12.827 31.369,11.938 31.369,10.033 30.607,9.271 26.289,9.271 24.13,11.43 24.13,16.891 28.194,20.955 28.194,22.098
M_PWR on Top Layer "M_PWR_L01_P009" (solid, pour order 9): 27.607,26.718 21.844,20.955 21.844,19.05 23.241,17.653 23.241,17.018 27.178,20.955 27.178,22.479 29.718,25.019 29.718,26.718
PGND on Top Layer "PGND_L01_P033" (solid, pour order 33): 59.69,24.892 61.214,26.416 65.405,26.416 66.167,27.178 74.168,27.178 74.93,26.416 74.93,22.606 73.406,22.606 71.755,20.955 71.755,15.748 67.183,15.748 65.024,17.907 62.357,17.907 59.69,20.574
PGND on Top Layer "NONET_L-01_P-001" (solid, remove dead copper, pour order 43): 27.819,15.991 27.819,13.583 30.099,11.303 38.481,11.303 43.897,5.887 43.897,2.104 46.681,2.104 47.244,2.667 47.244,4.318 49.276,4.318 50.927,5.969 50.927,22.606 32.893,22.606 27.813,17.526
M_PWR on Top Layer "M_PWR_L01_P005" (solid, pour order 5): 20.32,17.145 21.082,17.907 21.082,20.193 21.844,20.955 23.241,20.955 23.241,16.891 22.479,16.129 20.32,16.129
NetC19_2 on Top Layer "NONET_L-01_P-001" (solid, pour order 42): 44.831,14.859 44.831,15.367 46.863,15.367 48.006,16.51 48.006,21.971 47.117,22.86 44.958,20.701 44.958,19.177 46.228,17.907 46.228,16.764 44.323,16.764 43.815,16.256 43.815,14.859 44.323,14.351 44.323,13.589 44.45,13.462 45.339,13.462 45.466,13.589 45.466,14.224
VDDP on Top Layer "NONET_L-01_P-001" (solid, pour order 41): 29.645,22.552 30.226,21.971 30.226,21.336 32.385,19.177 44.323,19.177 46.228,17.272 46.228,16.764 45.085,16.764 45.085,17.069 44.374,17.78 42.291,17.78 41.529,17.018 40.386,17.018 40.386,17.145 39.751,17.78 39.751,18.034 35.433,18.034 33.782,16.383 30.48,16.383 29.972,16.891 28.956,16.891 28.321,20.574
M1_CS3 on Top Layer "M1_CS3_L01_P004" (solid, pour order 4): 13.97,19.812 13.97,16.51 14.986,15.494 14.986,10.668 11.938,7.62 11.938,4.826 12.065,4.699 14.605,4.699 14.605,7.62 18.288,11.303 18.288,13.97 14.605,17.653 14.605,19.812
OUT1 on Top Layer "OUT1_L01_P000" (solid, pour order 0): 7.112,11.811 8.89,11.811 8.89,10.033 9.398,9.525 9.398,4.445 6.948,4.445
OUT3 on Top Layer "OUT3_L01_P014" (solid, pour order 14): 57.15,11.938 56.896,9.652 55.118,7.874 55.118,5.334 57.29,5.334 59.436,11.938
M_PWR on Top Layer "M_PWR_L01_P020" (solid, pour order 20): 66.675,19.558 66.675,17.399 66.802,17.272 66.802,17.018 67.564,16.256 69.596,16.256 70.485,17.145 71.755,17.145 71.755,16.256 72.009,16.002 74.803,16.002 75.311,16.51 75.311,20.574 73.787,22.098 73.279,22.098 68.961,17.78 67.31,17.78 67.31,19.558
OUT2 on Top Layer "OUT2_L01_P001" (solid, pour order 1): 9.525,11.43 9.525,8.89 9.525,4.445 11.684,4.445 11.684,11.176 11.43,11.43
M1_CS2 on Top Layer "M1_CS2_L01_P003" (solid, pour order 3): 12.065,12.954 12.065,14.478 13.97,16.383 13.97,19.812 13.335,19.812 13.335,17.399 10.096,14.16 10.096,12.954
M2_CS2 on Top Layer "M2_CS2_L01_P017" (solid, pour order 17): 62.23,13.208 65.405,16.383 65.405,19.431 65.278,19.558 64.77,19.558 64.643,19.431 64.643,17.653 62.103,15.113 60.452,15.113 60.452,13.208
OUT4 on Top Layer "OUT4_L01_P015" (solid, pour order 15): 60.452,12.065 59.563,10.668 58.229,8.064 57.29,5.334 59.944,5.334 60.833,7.874 62.298,12.065
M2_CS1 on Top Layer "M2_CS1_L01_P018" (solid, pour order 18): 63.373,19.558 63.373,16.51 62.23,15.367 60.579,15.367 59.563,14.351 59.563,13.208 57.277,13.208 57.277,14.859 58.547,16.129 59.436,16.129 59.69,16.383 61.468,16.383 62.738,17.653 62.738,19.558
M_PWR on Top Layer "M_PWR_L01_P019" (solid, pour order 19): 62.738,19.558 62.738,17.653 61.595,16.51 59.817,16.51 59.436,16.129 58.039,16.129 58.039,17.272 58.166,17.399 59.309,17.399 59.69,17.78 61.976,17.78 62.103,17.907 62.103,19.558
NetDC1_1 on Top Layer "NETDC1_1_L01_P013" (solid, pour order 13): 50.673,7.874 53.213,7.874 53.213,0 34.036,0 32.766,1.27 36.449,4.953 44.069,4.953 44.704,4.318 44.704,2.032 47.244,2.032 47.117,2.159 47.117,4.445 49.657,4.445 50.673,5.461
NetDC1_1 on Top Layer "NETDC1_1_L01_P011" (solid, pour order 11): 33.147,10.922 30.988,8.763 27.432,8.763 27.432,0.889 37.211,0.889 37.211,10.922
M_PWR on Top Layer "M_PWR_L01_P007" (solid, pour order 7): 11.43,19.685 11.43,18.161 9.525,16.256 8.763,16.256 8.128,15.621 6.731,15.621 6.731,16.891 6.858,17.018 8.509,17.018 9.652,18.161 10.668,18.161 10.668,19.685 10.922,19.939 11.303,19.939
M_PWR on Top Layer "M_PWR_L01_P006" (solid, pour order 6): 21.082,20.193 20.955,20.193 18.923,18.161 16.129,18.161 15.875,18.415 15.875,19.685 15.748,19.812 15.494,19.812 15.494,19.685 15.367,19.558 15.367,17.78 15.494,17.653 16.51,16.637 18.669,16.637 19.177,17.145 20.701,17.145 20.955,17.399 21.717,17.399
M1_CS1 on Top Layer "M1_CS1_L01_P002" (solid, pour order 2): 11.557,19.812 11.43,19.685 11.43,17.907 9.779,16.256 8.763,16.256 6.985,14.478 6.985,12.954 8.763,12.954 9.652,13.843 9.652,14.478 12.065,16.891 12.065,19.685 11.938,19.812
AGND on Bottom Layer "AGND_L02_P045" (solid, remove dead copper, pour order 45): 0,0 0,50 80,50 80,0
PGND on Bottom Layer "PGND_L02_P036" (solid, pour order 36): 24.384,27.559 24.511,27.432 24.511,23.876 23.749,23.114 23.749,17.907 25.781,15.875 35.814,15.875 36.957,14.732 36.957,12.954 36.322,12.319 25.019,12.319 19.431,17.907 19.431,26.035 20.955,27.559
PGND on Bottom Layer "PGND_L02_P038" (solid, pour order 38): 48.641,24.257 47.625,23.241 47.625,21.209 48.006,20.828 48.006,17.78 58.801,17.78 62.103,21.082 62.103,22.86 60.706,24.257
M_PWR on Bottom Layer "M_PWR_L02_P032" (solid, pour order 32): 26.924,26.289 23.749,23.114 23.749,17.907 25.527,16.129 73.279,16.129 74.803,17.653 74.803,22.606 73.406,24.003 72.009,24.003 65.659,17.653 27.686,17.653 25.654,19.685 25.654,22.352 27.559,24.257 27.94,24.257 27.94,26.289
M_PWR on Bottom Layer "M_PWR_L02_P008" (solid, pour order 8): 7.874,16.764 8.763,17.653 18.542,17.653 18.796,17.399 18.796,16.764 17.907,15.875 8.128,15.875 7.874,16.129

## Keep-outs
Keep-Out Layer:
  circle w0.1: c76,46 r2
  circle w0.1: c76,4 r2
  circle w0.1: c4,4 r2
  circle w0.1: c4,46 r2
  circle w0.1: c76,46 r1.25
  circle w0.1: c76,4 r1.25
  circle w0.1: c4,4 r1.25
  circle w0.1: c4,46 r1.25
  lines w0.1: 0,0 0,50 80,50 80,0 0,0

## Silkscreen, mask and mechanical layers (free items; w line width, h text height)
Top Overlay:
  text "CLK" at 55.482,39.497 h1.52 r90
  text "DIO" at 58.022,39.497 h1.52 r90
  text "GND" at 60.562,39.497 h1.52 r90
  text "3.3V" at 63.102,39.497 h1.52 r90
  text "TXD" at 65.786,39.37 h1.52 r90
  text "RXD" at 68.326,39.37 h1.52 r90
  text "FOC DRIVER V0.4" at 15.24,30.502 h2
  text "2024.5 TIANXIAOHUA" at 14.985,28.592 h1.52
  text "SDA" at 16.908,10.414 h1.52 r270
  text "GND" at 19.956,10.414 h1.52 r270
  text "GND" at 70.629,10.414 h1.52 r270
  text "SDA" at 66.057,10.287 h1.52 r270
  text "SCL" at 15.13,10.16 h1.52 r270
  text "SCL" at 63.263,10.16 h1.52 r270
  text "5V" at 18.432,9.652 h1.52 r270
  text "5V" at 68.597,9.652 h1.52 r270
  text "GND" at 47.244,8.653 h1.52
  text "12v" at 51.054,8.509 h1.52
  text "C" at 60.96,8.018 h1.52
  text "A" at 55.753,8.001 h1.52
  text "B" at 58.42,8.001 h1.52
  text "C" at 12.827,7.764 h1.52
  text "A" at 7.62,7.747 h1.52
  text "B" at 10.414,7.747 h1.52
Bottom Overlay:
  text "GND" at 10.16,39.133 h1.52
  text "GND" at 71.882,38.879 h1.52
  text "CANL" at 10.033,37.101 h1.52
  text "RXD" at 71.755,36.83 h1.52
  text "CANH" at 10.033,35.069 h1.52
  text "TXD" at 71.755,34.798 h1.52
Top Solder:
  circle w1: c76,4 r1.5
  circle w1: c76,46 r1.5
  circle w1: c4,46 r1.5
  circle w1: c4,4 r1.5
Bottom Solder:
  circle w1: c76,4 r1.5
  circle w1: c76,46 r1.5
  circle w1: c4,46 r1.5
  circle w1: c4,4 r1.5

## Dimensions
2.5,46 to 0,50 on Mechanical 5
2.75,46 to 5.25,46 on Mechanical 5
0,50 to 80,50 on Mechanical 5
0,50 to 0,0 on Mechanical 5

## Text inside footprints (layer, text, board x,y; h text height)
X1: Top Overlay "*" at 20.877,46.228 h1.52 r270